# Altium PCB IMU_Board_CG_Rev1b.PcbDoc
Units mil, origin at the board's own origin, x right, y up, seen from the top; angles counter-clockwise.
Board outline 3000 x 2000 mil, 2 copper layers (Top Layer, Bottom Layer); 60 components, 36 nets, 212 pads, 67 vias.
Unrouted connection lines stored in the file: 11.
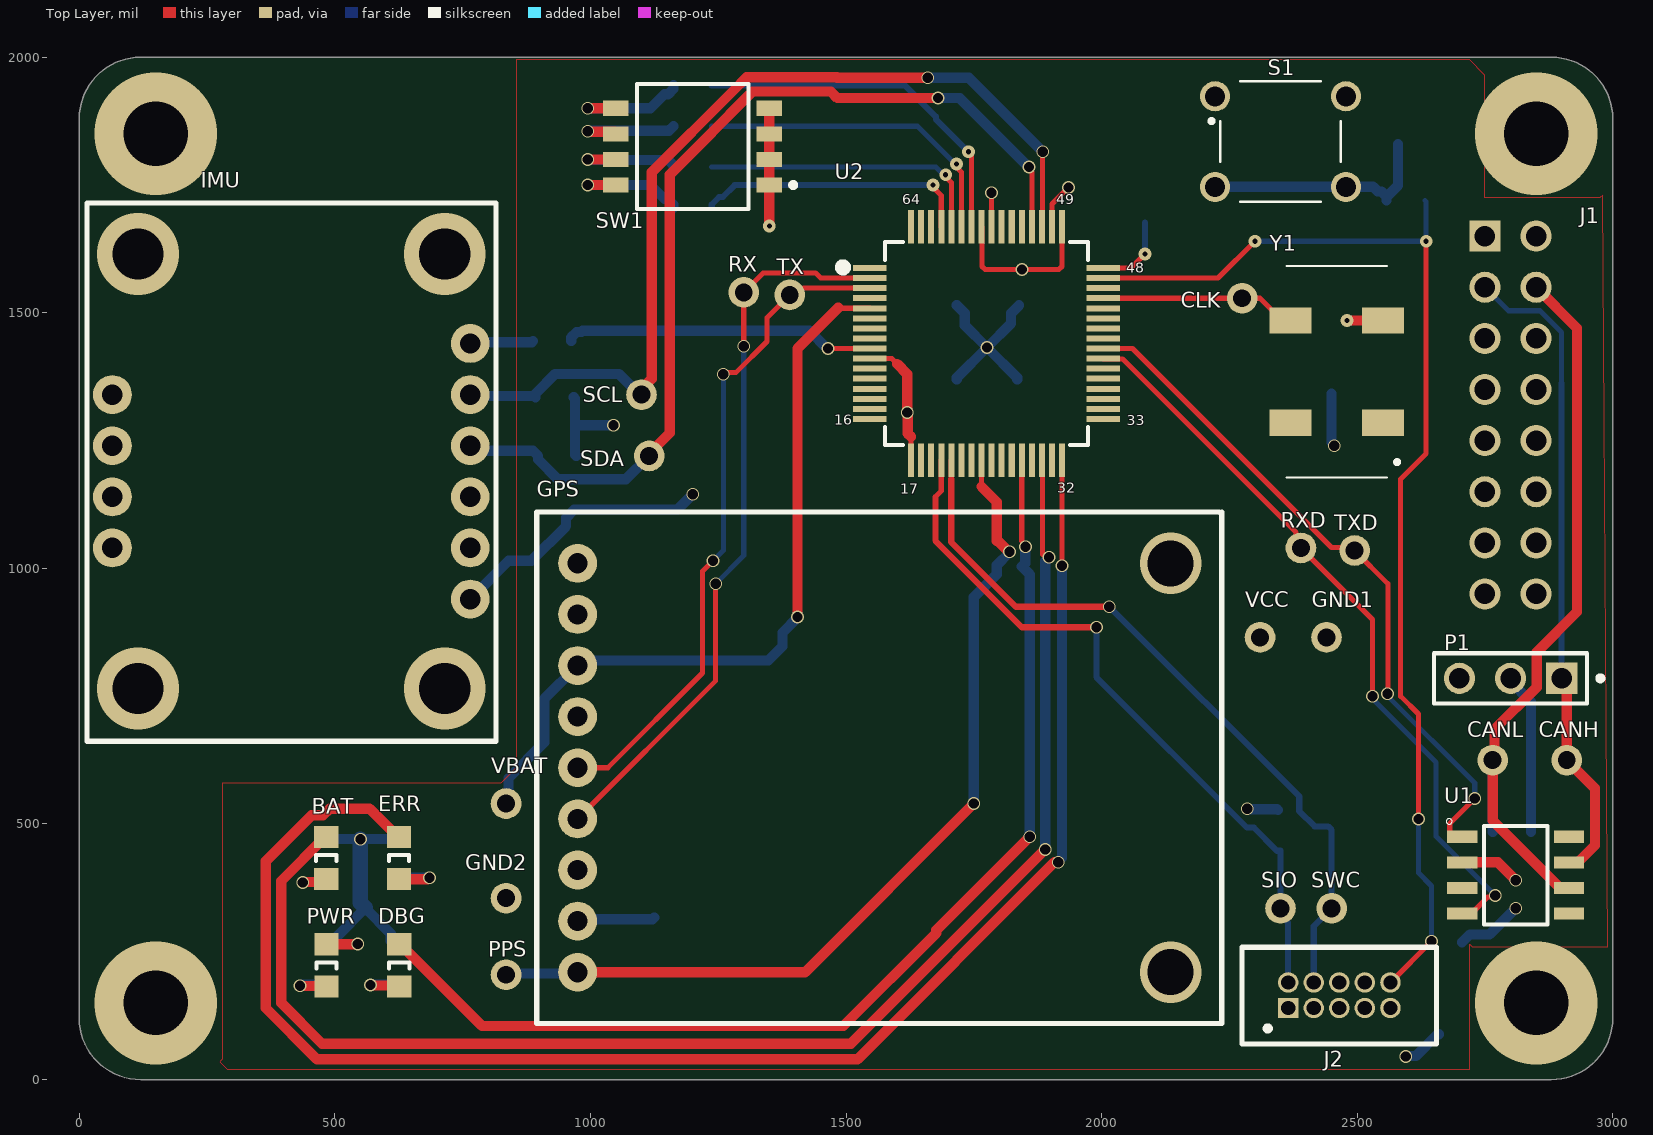
[diagram p0: Top Layer view]
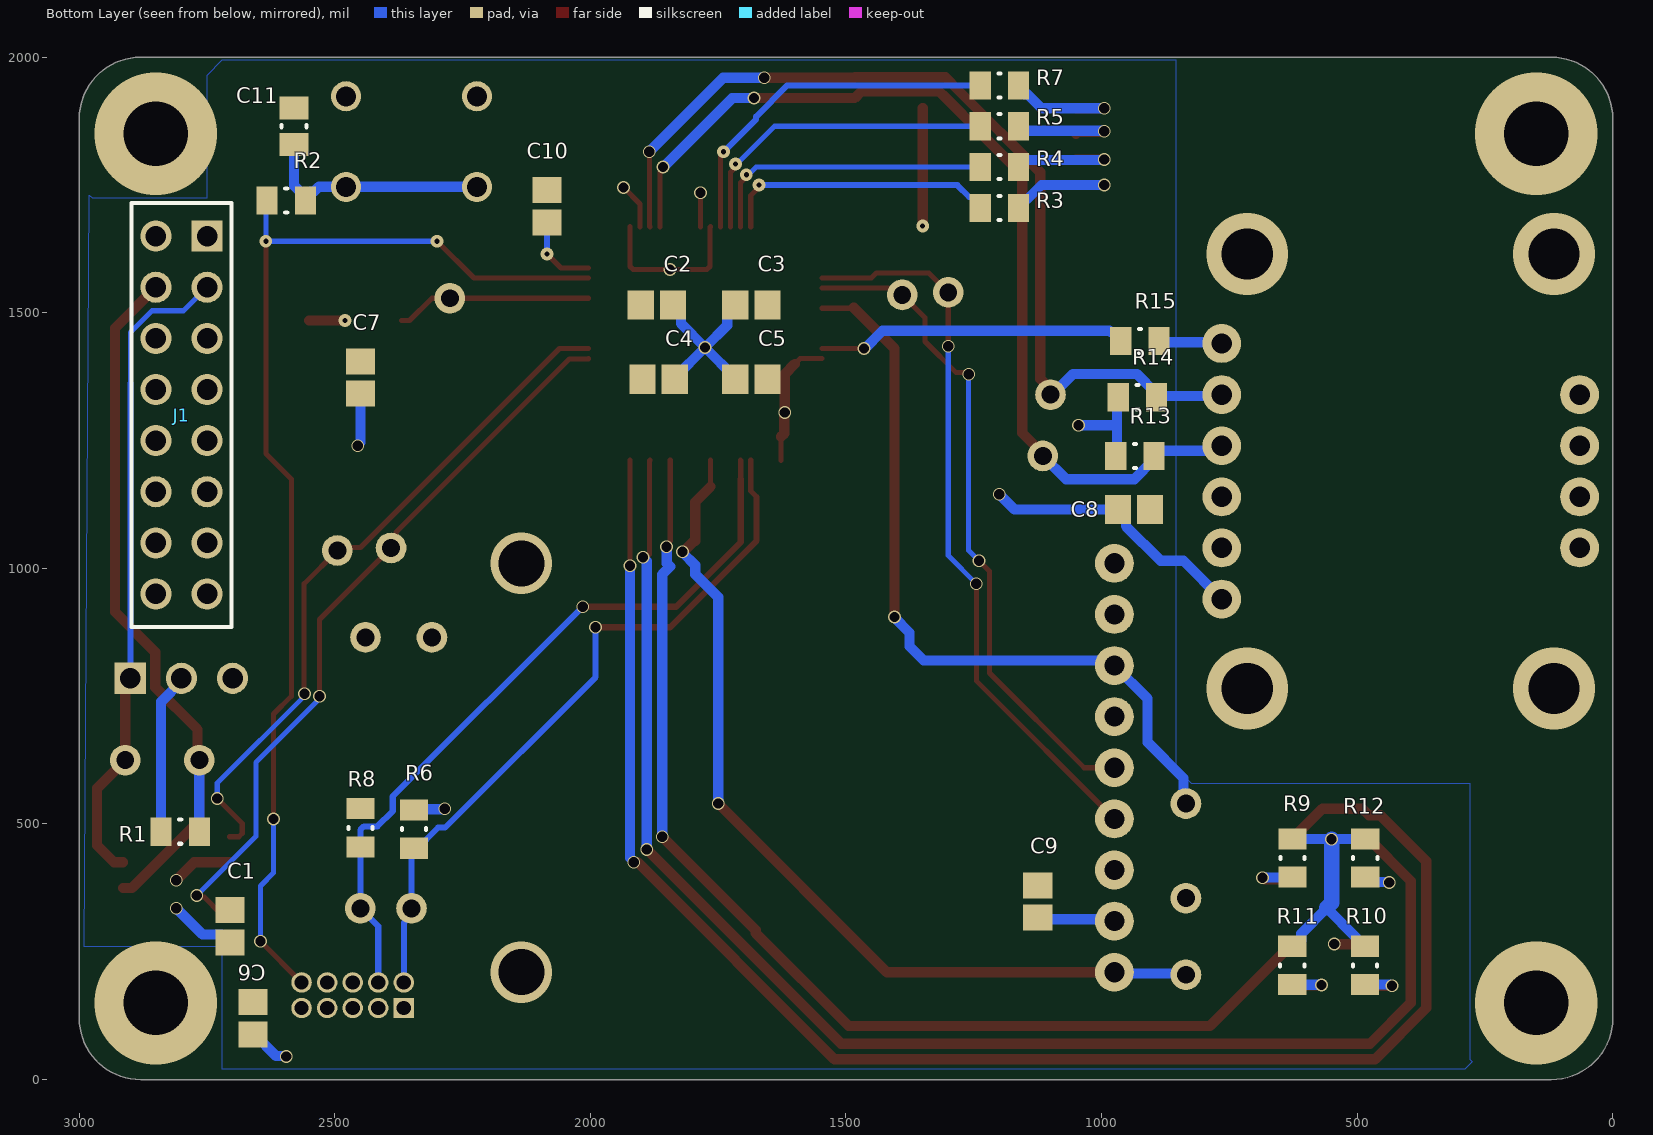
[diagram p1: Bottom Layer view, seen from below]
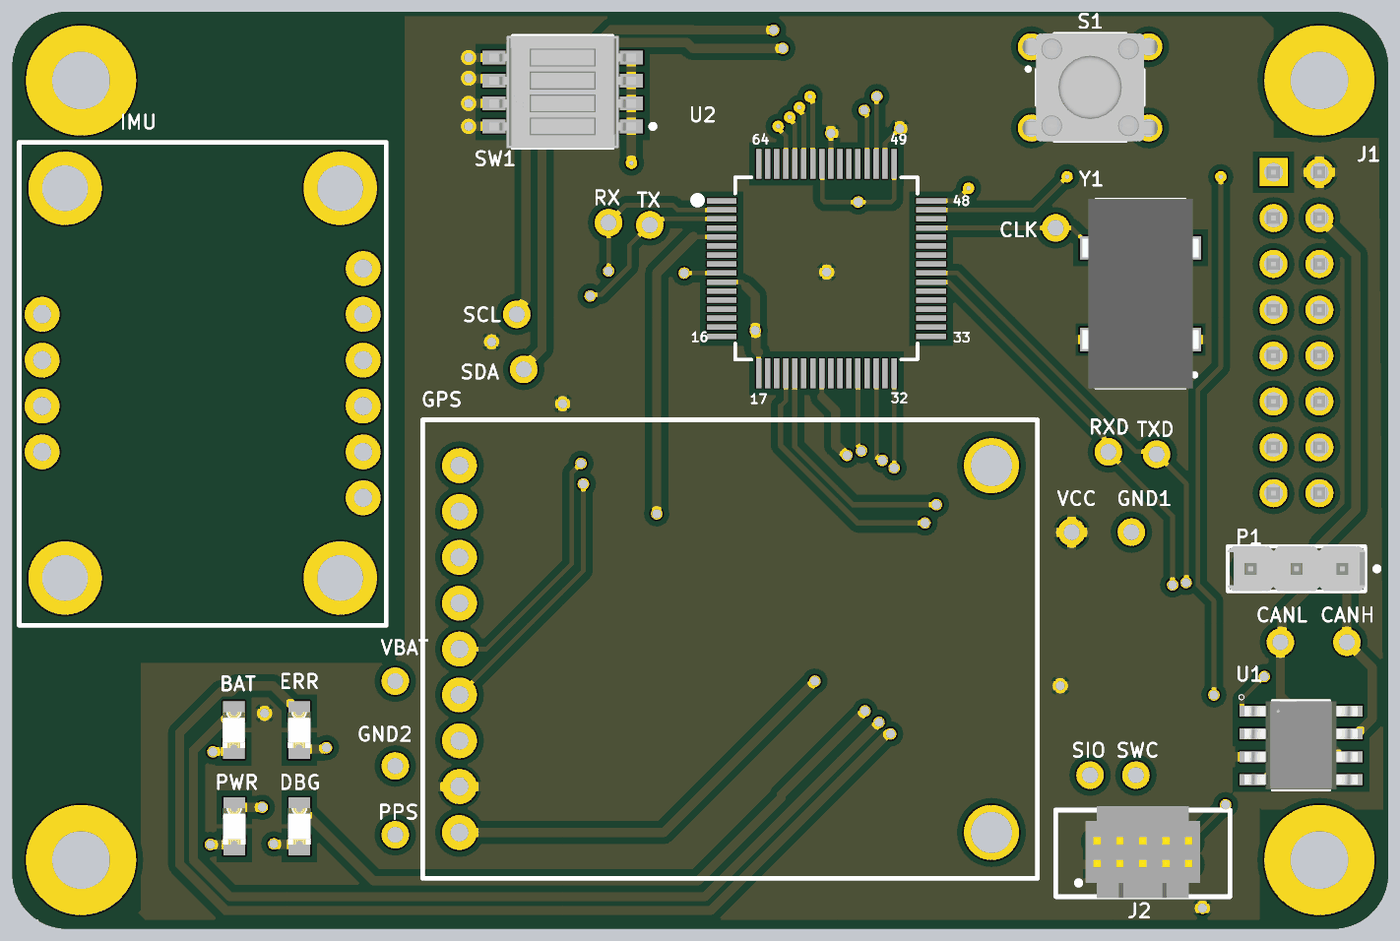
[diagram p2: 3D render of the assembled board from above, using the file's embedded part models]

## Layer stack, top to bottom
Top Solder: solder mask 0.4, Solder Resist, Dk 3.5
Top Layer: signal copper 1.4
Dielectric 1: dielectric 12.6, FR-4, Dk 4.8
Bottom Layer: signal copper 1.4
Bottom Solder: solder mask 0.4, Solder Resist, Dk 3.5

## Board outline
120,0 2880,0 ccw(c2880,120) 3000,120 3000,1880 ccw(c2880,1880) 2880,2000 120,2000 ccw(c120,1880) 0,1880 0,120 ccw(c120,120)

## Design rules (kind name [scope] priority, off if disabled: settings)
BoardOutlineClearance [All] p1: gap=10 ignorepadtopadclearanceinfootprint=FALSE
Clearance [All] p1: gap=5 ignorepadtopadclearanceinfootprint=TRUE except(0: Arc-Hole Track-Hole SMDPad-Hole THPad-Hole Via-Hole Fill-Hole Poly-Hole Region-Hole Text-Hole; 8: Track-Track Track-SMDPad Track-THPad Track-Via; 10: Poly-Poly; 15: Arc-Poly Track-Poly SMDPad-Poly THPad-Poly Via-Poly Fill-Poly)
ComponentClearance [All] p1: gap=0 collisioncheckmode=3 verticalgap=100000 showdistances=FALSE
Height [All] p1: minheight=0 maxheight=2000 prefheight=500
HoleSize [All] p1: absolutevalues=TRUE maxlimit=200 minlimit=10 maxpercent=80.000 minpercent=20.000
MinimumAnnularRing [All] p1: minimumring=6
MinimumSolderMaskSliver [All] p1: minsoldermaskwidth=5
PlaneConnect [All] p1: planeconnectstyle=Relief reliefexpansion=20 reliefentries=4 reliefconductorwidth=20 reliefairgap=10
PolygonConnect [All] p1: connectstyle=Relief reliefconductorwidth=20 reliefentries=4 polygonreliefangle="90 Angle" airgapwidth=10
RoutingVias [All] p1: holewidth=10 width=25 viastyle="Through Hole" minholewidth=10 minwidth=25 maxholewidth=28 maxwidth=50
SilkToSolderMaskClearance [IsPad] p1: minsilkscreentomaskgap=5 clearancetoexposedcopper=TRUE
SolderMaskExpansion [All] p1: expansion=4 istentingtop=FALSE
Width [All] p1: maxlimit=200 minlimit=5 preferedwidth=20 minimp=50.000000 maximp=50.000000 favimp=50.000000
24 further rules are at their usual default settings.

## Classes and differential pairs
component class IMU_Board_MC_CG: BAT C1 C2 C3 C4 C5 C6 C7 C10 C11 CANH CANL CLK DBG ERR GND1 GND2 J1 J2 P1 PWR R1 R2 R3 R4 R5 R6 R7 R8 R9 R10 R11 R12 RXD S1 SIO SW1 SWC TXD U1 U2 VCC Y1
component class IMU_Board_IMU_CG: C8 C9 GPS IMU PPS R13 R14 R15 RX SCL SDA TX VBAT

## Components (designator, comment, footprint, x,y, rotation, side; value= is the part's Value field where it differs from the comment)
1 "Screw Hole" "Screw Hole" 150,150 r90 top
2 "Screw Hole" "Screw Hole" 150,1850 r90 top
3 "Screw Hole" "Screw Hole" 2850,1850 r90 top
4 "Screw Hole" "Screw Hole" 2850,150 r90 top
BAT "LED" 0805_A 483.19,433.43 r270 top
C1 "Capacitor 0805" "Cap 0805" 2705,300 r270 bottom
C2 "Capacitor 0805" "Cap 0805" 1870.12,1515 r0 bottom
C3 "Capacitor 0805" "Cap 0805" 1685.12,1515 r180 bottom
C4 "Capacitor 0805" "Cap 0805" 1866.5,1370 r0 bottom
C5 "Capacitor 0805" "Cap 0805" 1685,1370 r180 bottom
C6 "Capacitor 0805" "Cap 0805" 2660,120 r270 bottom
C7 "Capacitor 0805" "Cap 0805" 2450,1373.5 r270 bottom
C8 "Capacitor 0805" "Cap 0805" 936.5,1115 r0 bottom
C9 "Capacitor 0805" "Cap 0805" 1125,348.5 r270 bottom
C10 "Capacitor 0805" "Cap 0805" 2085,1708.5 r90 bottom
C11 ".1uF" CAPC0805(2012)130_N 2580,1865 r90 bottom value=390pF
CANH "Test Point" "Test Point Through-hole" 2935,605 r90 top
CANL "Test Point" "Test Point Through-hole" 2790,605 r90 top
CLK "Test Point" "Test Point Through-hole" 2300,1508.58 r90 top
DBG "LED" 0805_A 626.06,223.43 r270 top
ERR "LED" 0805_A 625.32,433.43 r270 top
GND1 "Test Point" "Test Point Through-hole" 2465,845 r90 top
GND2 "Test Point" "Test Point Through-hole" 860,335 r90 top
GPS "MTK3339 Breakout" "MTK3339 Breakout" 895,1110 r270 top
IMU "BNO055 Breakout" "BNO055 Breakout" 815,660 r90 top
J1 "Stacking Header" SMTC-SSQ-108-02-X-D 2750,1650 r270 bottom
J2 "Programming Header" programming3D 2269.72,48.23 r0 top
P1 "Jumper" MOLX-22-28-4033_V 2800,785 r180 top
PPS "Test Point" "Test Point Through-hole" 860,185 r90 top
PWR "LED" 0805_A 483.94,223.43 r270 top
R1 "120R" RESC0805(2012)_N 2802.4,485 r0 bottom value="120.00 Ohm"
R2 "120R" RESC0805(2012)_N 2595,1720 r180 bottom value=100
R3 "120R" RESC0805(2012)_N 1200,1705 r180 bottom value="120.00 Ohm"
R4 "120R" RESC0805(2012)_N 1200,1785 r180 bottom value="120.00 Ohm"
R5 "120R" RESC0805(2012)_N 1200,1865 r180 bottom value="120.00 Ohm"
R6 "120R" RESC0805(2012)_N 2345,490 r90 bottom value=47k
R7 "120R" RESC0805(2012)_N 1200,1945 r180 bottom value="120.00 Ohm"
R8 "120R" RESC0805(2012)_N 2450,492.6 r270 bottom value=47k
R9 "120R" RESC0805(2012)_N 626.38,433.5 r90 bottom value="120.00 Ohm"
R10 "120R" RESC0805(2012)_N 485,223.5 r90 bottom value="120.00 Ohm"
R11 "120R" RESC0805(2012)_N 627.13,223.5 r90 bottom value="120.00 Ohm"
R12 "120R" RESC0805(2012)_N 484.25,433.5 r90 bottom value="120.00 Ohm"
R13 "120R" RESC0805(2012)_N 935,1220 r0 bottom value=4.7k
R14 "120R" RESC0805(2012)_N 930,1335 r0 bottom value=4.7k
R15 "120R" RESC0805(2012)_N 925,1445 r180 bottom value="120.00 Ohm"
RX "Test Point" "Test Point Through-hole" 1280,1515 r0 top
RXD "Test Point" "Test Point Through-hole" 2415,1020 r90 top
S1 "1825910-7" "Switch 6mm 24V (NO)" 2350,1835 r0 top
SCL "Test Point" "Test Point Through-hole" 1125,1320 r90 top
SDA "Test Point" "Test Point Through-hole" 1140,1200 r90 top
SIO "Test Point" "Test Point Through-hole" 2375,315 r90 top
SW1 "TDA04H0SB1" CKCP-TDA04H0SB1R_V 1200,1825 r180 top
SWC "Test Point" "Test Point Through-hole" 2475,315 r90 top
TX "Test Point" "Test Point Through-hole" 1370,1510 r0 top
TXD "Test Point" "Test Point Through-hole" 2520,1015 r90 top
U1 "MCP2562-E/SN" SOIC127P600X175-8N 2810,400 r0 top
U2 "CY8C4248AZI-L485" TQFP50P1200X1200X160-64N 1775,1440 r0 top
VBAT "Test Point" "Test Point Through-hole" 860,520 r90 top
VCC "Test Point" "Test Point Through-hole" 2335,845 r90 top
Y1 "SG-636PCW_50.0000MC3__ROHS" SG-636_3D 2460,1385 r90 top

## Footprints (in the part's own frame and the unit in brackets; to place one, negate y for a bottom-side part, rotate by r counter-clockwise, add the part's x,y. Pads: shape width x height; smd on the part's side, far side on the other; paste and mask are expansions set on the pad)
0805_A [mm] "Chip LED, 2-Leads, Body 2.0x1.3mm, IPC Medium Density"
  rect 1.1x1.2 smd: 1(-1.05,0) 2(1.05,0)
  silkscreen extent -0.15,-0.5 0.15,0.5, body extent -1,-0.62 1,0.63, height 0.68
"BNO055 Breakout" [mil]
  round 76 hole 40: 1(280,50) 2(380,50) 3(480,50) 4(580,50) 5(680,50) 6(780,50) 7(680,750) 8(580,750) 9(480,750) 10(380,750)
  silkscreen extent 2,0 1055,800
"Cap 0805" [mm]
  rect 1.3x1.45 smd: 1(-0.8,0) 2(0.8,0)
  body extent -1.1,-0.72 1.1,0.72, height 1.4
CAPC0805(2012)130_N [mm] "Chip Capacitor, Body 2.0x1.2mm, Height 1.3mm, IPC Medium Density"
  rect 1.15x1.45 smd: 1(-0.9,0) 2(0.9,0)
  silkscreen extent -0.05,-0.62 0.05,0.63, body extent -1.1,-0.72 1.1,0.73, height 1.3
CKCP-TDA04H0SB1R_V [mm] "SMD, 8-Leads, Body 6.21x6.2mm, Pitch 1.27mm"
  rect 1.27x0.76 smd: 1(-3.81,1.905) 2(-3.81,0.635) 3(-3.81,-0.635) 4(-3.81,-1.905) 5(3.81,-1.905) 6(3.81,-0.635) 7(3.81,0.635) 8(3.81,1.905)
  silkscreen extent -5.12,-3.11 2.78,3.11, body extent -4.06,-3.1 4.06,3.11, height 2.3
MOLX-22-28-4033_V [mm] "THD, 3-Leads, Body 7.62x2.49mm, Pitch 2.54mm"
  rect 1.55x1.55 hole 1.02: 1(-2.54,0)
  round 1.55 hole 1.02: 2(0,0) 3(2.54,0)
  silkscreen extent -4.59,-1.24 3.81,1.24, body extent -3.81,-1.24 3.81,1.24, height 8.38
"MTK3339 Breakout" [mil]
  round 76 hole 39.37: 1(100,80) 2(200,80) 3(300,80) 4(400,80) 5(500,80) 6(600,80) 7(700,80) 8(800,80) 9(900,80)
  silkscreen extent 0,0 1000,1340
programming3D [mil]
  rect 40x40 hole 28 mask+3: 1(95.28,91.77)
  round 40 hole 28 mask+3: 2(95.28,141.77) 3(145.28,91.77) 4(145.28,141.77) 5(195.28,91.77) 6(195.28,141.77) 7(245.28,91.77) 8(245.28,141.77) 9(295.28,91.77) 10(295.28,141.77)
  silkscreen extent 5,22 385,211, body extent 70,19 320,219, height 226
RESC0805(2012)_N [mm] "Chip Resistor, Body 2.0x1.3mm, IPC Medium Density"
  rect 1.05x1.4 smd: 1(-0.95,0) 2(0.95,0)
  silkscreen extent -0.05,-0.6 0.05,0.6, body extent -1.1,-0.67 1.1,0.68, height 0.7
"Screw Hole" [mil]
SG-636_3D [mm]
  rect 1.3x2.1 smd: 1(-2.54,-2.3) 2(2.54,-2.3) 3(2.54,2.3) 4(-2.54,2.3)
  silkscreen extent -5.25,-3.1 5.25,2.5, body extent -5.25,-3.22 5.25,3.22, height 2.8
SMTC-SSQ-108-02-X-D [mm] "SQ Post Socket, 2x8 Pins, Vertical, 2.54mm Pitch, Female"
  rect 1.55x1.55 hole 1.02: 1(0,0)
  round 1.55 hole 1.02: 2(0,-2.54) 3(2.54,0) 4(2.54,-2.54) 5(5.08,0) 6(5.08,-2.54) 7(7.62,0) 8(7.62,-2.54) 9(10.16,0) 10(10.16,-2.54) 11(12.7,0) 12(12.7,-2.54) 13(15.24,0) 14(15.24,-2.54) 15(17.78,0) 16(17.78,-2.54)
  silkscreen extent -1.65,-3.74 19.43,1.2, body extent -1.52,-3.75 19.3,1.21, height 8.51
SOIC127P600X175-8N [mm]
  rect 1.5x0.6 smd: 1(-2.65,1.905) 2(-2.65,0.635) 3(-2.65,-0.635) 4(-2.65,-1.905) 5(2.65,-1.905) 6(2.65,-0.635) 7(2.65,0.635) 8(2.65,1.905)
  silkscreen extent -3.44,-2.45 1.58,2.81, body extent -3.12,-2.45 3.13,2.45, height 1.76
"Switch 6mm 24V (NO)" [mm]
  round 1.498 hole 0.99: 1a(-3.25,2.25) 1b(3.25,2.25) 2a(-3.25,-2.25) 2b(3.25,-2.25)
  silkscreen extent -3.53,-3 3,3, body extent -3.9,-2.99 3.9,3, height 5.01
"Test Point Through-hole" [mil]
  round 60 hole 35: 1(20,25)
TQFP50P1200X1200X160-64N [mm]
  rect 1.65x0.3 smd mask+0.076: 1(-5.801,3.75) 2(-5.801,3.25) 3(-5.801,2.75) 4(-5.801,2.25) 5(-5.801,1.75) 6(-5.801,1.25) 7(-5.801,0.75) 8(-5.801,0.25) 9(-5.801,-0.25) 10(-5.801,-0.75) 11(-5.801,-1.25) 12(-5.801,-1.75) 13(-5.801,-2.25) 14(-5.801,-2.75) 15(-5.801,-3.25) 16(-5.801,-3.75) 33(5.801,-3.75) 34(5.801,-3.25) 35(5.801,-2.75) 36(5.801,-2.25) 37(5.801,-1.75) 38(5.801,-1.25) 39(5.801,-0.75) 40(5.801,-0.25) 41(5.801,0.25) 42(5.801,0.75) 43(5.801,1.25) 44(5.801,1.75) 45(5.801,2.25) 46(5.801,2.75) 48(5.801,3.75)
  rect 0.3x1.65 smd mask+0.076: 17(-3.75,-5.801) 18(-3.25,-5.801) 19(-2.75,-5.801) 20(-2.25,-5.801) 21(-1.75,-5.801) 22(-1.25,-5.801) 23(-0.75,-5.801) 24(-0.25,-5.801) 25(0.25,-5.801) 26(0.75,-5.801) 27(1.25,-5.801) 28(1.75,-5.801) 29(2.25,-5.801) 30(2.75,-5.801) 31(3.25,-5.801) 32(3.75,-5.801) 49(3.75,5.801) 50(3.25,5.801) 51(2.75,5.801) 52(2.25,5.801) 53(1.75,5.801) 54(1.25,5.801) 55(0.75,5.801) 56(0.25,5.801) 57(-0.25,5.801) 58(-0.75,5.801) 59(-1.25,5.801) 60(-1.75,5.801) 61(-2.25,5.801) 62(-2.75,5.801) 63(-3.25,5.801) 64(-3.75,5.801)
  rect 1.65x0.3 smd paste+0 mask+0.076: 47(5.801,3.25)
  silkscreen extent -7.33,-5.05 5.05,5.05, body extent -5.12,-5.12 5.12,5.12, height 1.6

## Part data
1 2 3 4: "Add 4 of these to your design for screw hole mounting"
BAT DBG ERR PWR: "Standard 0805 LED", Color="Super Red", Manufacturer="Wuerth Elektronik", PartNumber=150080SS75000, ComponentLink1Description="Manufacturer URL", ComponentLink1URL=http://www.we-online.com, ComponentLink2Description=Datasheet, ComponentLink2URL=http://katalog.we-online.com/led/datasheet/150080SS75000.pdf, PackageReference=0805_A
C1 C4 C5 C6 C7 C8 C9: "Standard Capacitor", Capacitance=.1µF, Case Size/Dimension=0805, Dielectric=X5R, Manufacturer=AVX, Package Description="2-Pin Surface Mount Device, Body 2.01 x 1.25 mm", Rated Voltage=10V, Tolerance (%)=±10%, Datasheet URL=http://datasheets.avx.com/cx5r.pdf, Datasheet Version=05/2016, Manufacturer URL=http://www.avx.com/, Mounting Technology=SurfaceMount, Package Reference=0805
C2 C3: "Standard Capacitor", Capacitance=10µF, Case Size/Dimension=0805, Dielectric=X5R, Manufacturer=AVX, Package Description="2-Pin Surface Mount Device, Body 2.01 x 1.25 mm", Rated Voltage=10V, Tolerance (%)=±10%, Datasheet URL=http://datasheets.avx.com/cx5r.pdf, Datasheet Version=05/2016, Manufacturer URL=http://www.avx.com/, Mounting Technology=SurfaceMount, Package Reference=0805
C10: "Standard Capacitor", Capacitance=1µF, Case Size/Dimension=0805, Dielectric=X5R, Manufacturer=AVX, Package Description="2-Pin Surface Mount Device, Body 2.01 x 1.25 mm", Rated Voltage=10V, Tolerance (%)=±10%, Datasheet URL=http://datasheets.avx.com/cx5r.pdf, Datasheet Version=05/2016, Manufacturer URL=http://www.avx.com/, Mounting Technology=SurfaceMount, Package Reference=0805
C11: library part CMP-1036-02603-1, "CAP 390pF 200V ±5% 0805 (2012 Metric) Thickness 1.3mm SMD", Case-EIA=0805, Case-Metric=2012, Rated Voltage="200 V", Tolerance=Â±5%, Max Thickness="1.3 mm", Technology=SMT
J1: "SQ Post Socket, Through-hole, Vertical, -55 to 125 degC, 2.54 mm Pitch, 16-Pin, Female, RoHS", Manufacturer=Samtec, PartNumber=SSQ-108-02-G-D, Temperature Range="-55 to 125 degC", ComponentLink1Description="Manufacturer URL", ComponentLink1URL=http://www.samtec.com, ComponentLink2Description=Datasheet, ComponentLink2URL=http://www.samtec.com/documents/webfiles/pdf/SSQ_TH.PDF, ComponentLink3Description="Package Specification", ComponentLink3URL=http://www.samtec.com/documents/webfiles/cpdf/SSQ-1XX-XX-XXX-X-XX-XXX-XX-X-MKT.pdf, DatasheetVersion=F-214, Mounting Technology=Through-hole, Orientation=Vertical, PackageDescription="Assembly, Socket Strip .025[0.64] SQ Tail", PackageReference=SSQ-108-02-X-D, PackageVersion="BD, 6/1987", Pitch="2.54 mm", RoHS=True
P1: library part CMP-1676-00001-5, "Male Header, Pitch 2.54 mm, 1 x 3 Position, Height 8.38 mm, Tail Length 3.18 mm, RoHS, Bulk", Colour=Black, Current Rating="4 A", Manufacturer=Molex, Max Operating Temperature="75 degC", Min Operating Temperature="0 degC", Package Quantity=1, Voltage Rating="250 V", ComponentLink1Description="Manufacturer URL", ComponentLink1URL=http://www.molex.com/, ComponentLink2Description=Datasheet, ComponentLink2URL=http://www.molex.com/pdm_docs/sd/022284033_sd.pdf, Contact Finish=Gold, Contact Material=Brass, Contact Plating=Gold, DatasheetVersion="Rev. G, 01/2012", Height="8.38 mm", Lead Pitch="0.1 inch", Length="7.62 mm", Mount="Through Hole", Mounting Technology="Through Hole", PackageDescription="Male Header, Pitch 2.54 mm, 1 x 3 Position, Height 8.38 mm, Tail Length 3.18 mm", PackageReference=22-28-4033, Packaging=Bulk, Pins=3, REACH SVHC=Unknown, RoHSCompliant=true, Rows=1
R1 R2 R3 R4 R5 R6 R7 R8 R9 R10 R11 R12 R13 R14 R15: library part "Resistor 0805", "Generic 0805 Resistor", Case-EIA=0805, Case-Metric=2012, Power="0.125 W", Tolerance="5 %", Technology=SMT
S1: library part "Switch 6mm 24V (NO)", "FSM4JAH=6MM TACT SWITCH, HIGH TEMP", Contact_Current_Rating="50 mA", Package=None, Configuration_Pole-Throw="Single Pole - Single Throw", Digi-Key_Part_Number=450-1804-ND, Digi-Key_Purchase_URL=https://www.digikey.com/product-detail/en/te-connectivity-alcoswitch-switches/1825910-7/450-1804-ND/1731414?utm_source=snapeda&utm_medium=aggregator&utm_campaign=symbol, EU_RoHS_Compliance=Compliant, MF="TE Connectivity", MP=1825910-7, SnapEDA_Link=https://www.snapeda.com/parts/1825910-7/TE%20Connectivity%20ALCOSWITCH%20Switches/view-part/?ref=snap, TE_purchase_URL=https://www.te.com/usa-en/product-1825910-7.html?te_bu=Cor&te_type=disp&te_campaign=seda_glo_cor-seda-global-disp-prtnr-fy19-seda-model-bom-cta_sma-317_1&elqCampaignId=32493
SW1: library part "Dip Switch Array SMD Half-Pitch", "Ultra-Miniature Surface Mount Half-Pitch DIP Switch, 25 mA, 24 V, -40 to 85 degC, 8-Pin SMD, RoHS, Tube", Case\Package=DIP, Contact Current Rating="100 mA", Max Contact Resistance="100 mohm", Max Current Rating="25 mA", Max Operating Temperature="85 degC", Max Voltage Rating (DC)="24 V", Min Operating Temperature="-40 degC", Package Quantity=70, ComponentLink1Description=Datasheet, ComponentLink1URL=http://www.ck-components.com/media/1328/tda.pdf, Contact Finish=Gold, Contact Material=Copper, Contact Plating=Gold, Current Rating="100 mA", DatasheetVersion=02/2016, Height="2.3 mm", Lead Pitch="1.27 mm", Length="6.21 mm", Mount="Surface Mount", Mounting Technology="Surface Mount", PackageDescription="8-Pin Surface Mount Device, Body 6.21 x 6.2 mm, Pitch 1.27 mm", PackageReference=TDA04H0SB1R, Packaging=Rail/Tube, Pins=4, Radiation Hardening=No, REACH SVHC="No SVHC", RoHSCompliant=true, Throw Configuration=SPST, Voltage Rating (DC)="24 V"
U1: library part "CAN Tranceiver", "Microchip MCP2562-E/SN, CAN Transceiver 1MBps 1-channel IEC 61000-4-2, 8-Pin SOIC", Package="SO-8 Microchip", Availability=Unavailable, MF=Microchip, MP=MCP2562-E/SN, Price=None, SnapEDA_Link=https://www.snapeda.com/parts/MCP2562-E/SN/Microchip/view-part/?ref=snap
U2: library part "PSOC MC", "64 pin psoc", Part_Number=CY8C4248AZI-L485
Y1: library part Oscilator, "Standard Clock Oscillators", Arrow Part Number="SG-636PCW 50.0000MC3: ROHS", Manufacturer_Name="Epson Timing", Datasheet Link=http://www.mouser.com/ds/2/137/G-636PCE_en-1003252.pdf, Manufacturer_Part_Number="SG-636PCW 50.0000MC3: ROHS"

## Via types
v1: diameter 25, hole 20, Top Layer to Bottom Layer, 48 vias
v2: diameter 25, hole 10, Top Layer to Bottom Layer, 9 vias
v3: diameter 160, hole 100, Top Layer to Bottom Layer, 4 vias
v4: diameter 240, hole 126, Top Layer to Bottom Layer, 4 vias
v5: diameter 120, hole 90, Top Layer to Bottom Layer, 2 vias

## Nets (pads, with @x,y where several pads share a name; then routed paths per layer and width w, separated by ;. In a path a pad name is that pad's centre, name@x,y a point inside that pad or via, vN(x,y) a via of type N, cw(c..) or ccw(c..) an arc to the next point about the centre after c; other vN are vias at no path point)
"BAT STAT": BAT.1 U2.30 | length 2822.2
  Top Layer w10: U2.30 1884.05,1210.84 1884.05,1027.55 1887.19,1027.55 1893.05,1021.69 v1(1897.11,1021.69)
  Top Layer w20: BAT.1 481.22,474.76 395,388.54 395,150 475,70 1509.5,70 v1(1889.75,450.25)
  Bottom Layer w20: v1(1889.75,450.25) 1889.75,1014.33 v1(1897.11,1021.69)
CANH: CANH.1 J1.3 P1.1 U1.7 | length 1281.5
  Top Layer w20: P1.1 2910,775 CANH.1 2965,570 2965,457.95 2932.05,425 U1.7
  Bottom Layer w10: J1.3 2795.87,1504.13 2857.4,1504.13 2900,1461.53 2900,1362.95
  Bottom Layer w12: P1.1 2900,1362.95
CANL: CANL.1 J1.4 R1.1 U1.6 | length 1488.7
  Top Layer w20: J1.4 2930,1470 2930,915 2851.33,836.33 2851.33,767.72 2768.61,685 2768.61,628.61 CANL.1 2765,506.61 2896.61,375 U1.6
  Bottom Layer w20: R1.1 CANL.1
CANL1: P1.2 R1.2 | length 316.5
  Bottom Layer w20: P1.2 2800,779.03 2839.8,739.23 R1.2
CLK: CLK.1 U2.45 Y1.3 | length 384.1
  Top Layer w10: U2.45 CLK.1 2310.12,1528.58 2353.7,1485 Y1.3
DBG: DBG.1 U2.28 | length 2205.2
  Top Layer w10: U2.28 1843.9,1053.86 1851.4,1046.36 v1(1851.4,1042.3)
  Top Layer w20: DBG.1 628.03,264.76 787.8,105 1495,105 1676.65,286.65 1676.65,292.4 v1(1859.25,475)
  Bottom Layer w20: v1(1851.4,1042.3) 1850.44,1041.34 1850.44,1010.19 1843.9,1003.65 1859.25,988.3 v1(1859.25,475)
DIP1: R7.1 U2.58 | length 708.3
  Top Layer w10: v2(1739.5,1815) 1745.24,1809.26 1745.24,1668.61 U2.58
  Bottom Layer w12: R7.1 1615,1945 1676.01,1883.99 1676.01,1878.49 v2(1739.5,1815)
DIP2: R5.1 U2.59 | length 636.2
  Top Layer w10: v2(1716.21,1791.21) 1716.21,1784.73 1725.79,1775.15 U2.59
  Bottom Layer w10: R5.1 1640,1865 1713.79,1791.21 v2(1716.21,1791.21)
DIP3: R4.1 U2.60 | length 570
  Top Layer w10: v2(1695,1770) 1695,1765.94 1706.1,1754.84 U2.60
  Bottom Layer w10: R4.1 1675.94,1785 1690.94,1770 v2(1695,1770)
DIP4: R3.1 U2.61 | length 543.7
  Top Layer w10: v2(1670,1750) 1670,1745.94 1686.42,1729.52 U2.61
  Bottom Layer w12: R3.1 1237.4,1711.89 1252.07,1726.56 1258.96,1726.56 1282.4,1750 v2(1670,1750)
ERR: ERR.1 U2.32 | length 3153.7
  Top Layer w10: v1(1922.64,1005) U2.32
  Top Layer w20: ERR.1 623.35,474.76 568.11,530 490,530 476.94,516.94 454.63,516.94 365,427.31 365,140 465,40 1522.63,40 1907.63,425 v1(1915,425)
  Bottom Layer w20: v1(1915,425) 1915,426.35 1922.64,433.99 v1(1922.64,1005)
GND: C1.1 C2.2 C3.2 C4.2 C5.2 C6.1 C7.1 C8.1 C9.1 C10.2 C11.2 GND1.1 GND2.1 GPS.7 IMU.3 J1.6 J1.8 J1.10 J1.12 J1.14 J1.16 J2.3 J2.5 J2.9 PWR.1 R8.1 S1.1a S1.1b SW1.1 SW1.2 SW1.3 SW1.4 U1.2 U2.10 U2.17 U2.49 U2.57 Y1.2 | length 1054.9
  Top Layer w10: U2.10 1589.53,1410.47 1600,1400 ; U2.17 1627.36,1257.36 ; U2.57 1765.94,1667.6 1765.94,1590.86 1771.79,1585 v1(1844.29,1585) 1916.78,1585 1922.64,1590.86 U2.49
  Top Layer w20: PWR.1 484.06,264.88 544.88,264.88 v1(545,265) ; v2(1350,1670) SW1.1 SW1.2 SW1.3 SW1.4 ; 1600,1400 1620,1380 v1(1620,1305) 1620.96,1304.04 1620.96,1263.77 1627.36,1257.36 ; v2(2480,1485) Y1.2 ; U1.2 2775,425 v1(2810,390)
IMU_RST: R15.1 U2.9 | length 611.1
  Top Layer w10: v1(1465,1430) 1465.08,1430.08 1546.54,1430.08 U2.9
  Bottom Layer w20: R15.1 962.4,1451.89 973.07,1462.56 982.35,1462.56 984.79,1465 1428.65,1465 1463.65,1430 v1(1465,1430)
NetBAT_2: BAT.2 R12.1 | length 99.6
  Top Layer w20: v1(437.35,385.79) 438.3,386.74 477.85,386.74 BAT.2
  Bottom Layer w20: v1(437.35,385.79) 438.3,386.74 474.89,386.74 R12.1
NetC10_1: C10.1 U2.48 | length 155
  Top Layer w10: U2.48 2057.64,1587.64 v2(2085,1615)
  Bottom Layer w12: v2(2085,1615) C10.1
NetDBG_2: DBG.2 R11.1 | length 115.6
  Top Layer w20: v1(570,185) 570.96,184.04 624.11,184.04 DBG.2
  Bottom Layer w20: v1(570,185) 570.55,185.55 626.57,185.55 R11.1 R11.1@627.68,185.55
NetERR_2: ERR.2 R9.1 | length 120
  Top Layer w20: ERR.2 680.73,392.09 683.65,395 v1(685,395)
  Bottom Layer w20: R9.1 626.93,395.55 684.45,395.55 v1(685,395)
NetIMU_6: IMU.6 R15.2 | length 124.7
  Bottom Layer w20: IMU.6 767.5,1442.5 885.1,1442.5 R15.2
NetPWR_2: PWR.2 R10.1 | length 106.8
  Top Layer w20: v1(431.88,183.78) 432.73,182.93 483.09,182.93 PWR.2
  Bottom Layer w20: v1(431.88,183.78) 433.24,183.78 435.56,186.1 R10.1
NetR3_2: R3.2 SW1.8 | length 245.3
  Top Layer w20: v1(995,1750) SW1.8
  Bottom Layer w20: v1(995,1750) 1117.6,1750 1145.04,1722.56 1151.93,1722.56 1162.6,1711.89 R3.2
NetR4_2: R4.2 SW1.7 | length 230.8
  Top Layer w20: v1(995,1800) SW1.7
  Bottom Layer w20: v1(995,1800) 995.96,1799.04 1151.93,1799.04 1162.6,1788.37 R4.2
NetR5_2: R5.2 SW1.6 | length 228.8
  Top Layer w20: v1(995,1855) 995.96,1854.04 1045.96,1854.04 SW1.6
  Bottom Layer w20: v1(995,1855) 995.96,1855.96 1153.55,1855.96 R5.2
NetR7_2: R7.2 SW1.5 | length 245.3
  Top Layer w20: v1(995,1900) SW1.5
  Bottom Layer w20: v1(995,1900) 1117.6,1900 1145.04,1927.44 1151.93,1927.44 1162.6,1938.11 R7.2
PPS: GPS.9 PPS.1 U2.24 | length 1782.8
  Top Layer w10: 1765,1160 1765.16,1160.16 U2.24
  Top Layer w20: PPS.1@826,205 PPS.1@828.5,207.5 ; GPS.9 1420,210 v1(1750,540) ; 1765,1160 1795,1130 1795,1053.94 1797.18,1053.94 1818.59,1032.54 v1(1819.94,1032.54)
  Bottom Layer w20: PPS.1 837.5,207.5 972.5,207.5 GPS.9 ; v1(1750,540) 1750,943.65 1795,988.65 1795,1006.24 1819.94,1031.18 v1(1819.94,1032.54)
PWR: C1.2 C2.1 C3.1 C4.1 C5.1 C6.2 C7.2 C8.2 C9.2 GPS.8 IMU.1 J1.2 J2.1 R6.2 R9.2 R10.2 R11.2 R12.2 R13.2 R14.2 U1.3 U2.11 U2.26 U2.50 U2.56 VCC.1 Y1.1 Y1.4 | length 2299.8
  Top Layer w10: U2.56 v1(1784.84,1734.84) ; U2.50 1902.95,1712.95 v1(1935,1745)
  Bottom Layer w20: R12.2 R9.2 ; R10.2 491.89,260.91 502.56,271.57 502.56,278.46 560,335.91 560,335 609.57,285.43 609.57,271.57 620.24,260.91 R11.2 ; IMU.1 839.86,1014.86 884.45,1014.86 952.4,1082.81 952.4,1099.41 C8.2 1169.9,1115 1199.9,1145 v1(1200,1145) ; R14.2 969.9,1332.5 969.9,1277.5 ; R13.2 969.9,1222.5 969.9,1277.5 ; GPS.8 978.5,313.5 1121.5,313.5 C9.2 ; v1(1045,1280) 972.4,1280 969.9,1277.5 ; C5.1 1716.5,1372.95 v1(1775.75,1432.2) ; C3.1 1732.2,1499.41 1732.2,1475.75 v1(1775.75,1432.2) ; C4.1 1835,1372.95 v1(1775.75,1432.2) ; C2.1 1823.03,1499.41 1823.03,1479.49 v1(1775.75,1432.2) ; v1(2285,530) 2285.96,529.04 2343.36,529.04 R6.2 ; C7.2 2450,1246.35 2455,1241.35 v1(2455,1240) ; v1(2595,45) 2595.96,45.96 2614.5,45.96 2657.05,88.5 C6.2 ; C1.2 2720.59,284.09 2759.09,284.09 v1(2810,335)
  Bottom Layer w30: v1(550,470) 550,345.91 560,335.91
RX: GPS.6 RX.1 U2.2 | length 1431.1
  Top Layer w10: GPS.6 1245,780 v1(1245,970) ; v1(1300,1434.5) RX.1 1338,1578 1440.64,1578 1450.69,1567.95 U2.2
  Bottom Layer w10: v1(1245,970) 1300,1025 v1(1300,1434.5)
RXD: RXD.1 U1.4 U2.39 | length 1468.6
  Top Layer w10: U2.39 2004.16,1409.69 2041.24,1409.69 2380.43,1070.5 2380.43,1049.57 RXD.1 2530,900 2530,750.06 v1(2529.92,749.99) ; U1.4 2723.39,325 2755.52,357.13 2767.13,357.13 v1(2770,360)
  Bottom Layer w10: v1(2529.92,749.99) 2530,749.91 2530,745 2654.5,620.5 2654.5,475.5 v1(2770,360)
SCL: IMU.5 R14.1 SCL.1 U2.51 | length 1869.9
  Top Layer w10: U2.51 1884.05,1669.16 1884.05,1814.05 v1(1885,1815)
  Top Layer w20: SCL.1 1100,1350.82 1120,1370.82 1120,1775 1279,1934 1305.95,1960.96 1481.82,1960.96 1482.78,1960 v1(1660,1960)
  Bottom Layer w20: IMU.5 767.5,1337.5 890.1,1337.5 R14.1 892.6,1341.89 931.27,1380.56 1055.71,1380.56 1096.27,1340 SCL.1 ; v1(1660,1960) 1740,1960 v1(1885,1815)
SDA: IMU.4 R13.1 SDA.1 U2.52 | length 1917.5
  Top Layer w10: v1(1857.77,1785) 1857.77,1780.94 1863.58,1775.13 U2.52
  Top Layer w20: SDA.1 1115,1224.85 1155,1264.85 1155,1770 1236.27,1851.27 1236.27,1851.67 1307,1922.4 1317.54,1932.96 1470.22,1932.96 1483.18,1920 v1(1680,1920)
  Bottom Layer w20: IMU.4 775,1230 887.6,1230 R13.1 897.6,1213.11 936.27,1174.44 1069.44,1174.44 SDA.1 ; v1(1680,1920) 1722.77,1920 v1(1857.77,1785)
SWCLK: J2.4 R8.2 SWC.1 U2.21 | length 1467
  Top Layer w10: 1705.88,1175 1705.88,1211.4 U2.21
  Top Layer w12: 1705.88,1175 1705.88,1051.64 1832.52,925 v1(2015,925)
  Bottom Layer w12: v1(2015,925) 2015.43,925 2386.56,553.87 2386.56,525.41 2416.64,495.33 2442.97,495.33 2450,488.3 R8.2 SWC.1 2415,300 J2.4
SWDIO: J2.2 R6.1 SIO.1 U2.20 | length 1409.3
  Top Layer w10: 1675,1140 1686.42,1151.42 U2.20
  Top Layer w12: 1675,1140 1675,1054.24 1844.24,885 v1(1990,885)
  Bottom Layer w12: v1(1990,885) 1990,787.52 2284.38,493.15 2297.56,493.15 2343.11,447.6 2350,447.6 SIO.1 2350,322.01 2365,307.01 J2.2
TX: GPS.5 TX.1 U2.3 | length 1306.2
  Top Layer w10: GPS.5 1034,610 1219.5,795.5 1219.5,994.5 v1(1240,1015) ; v1(1260,1380) 1262.87,1382.87 1284.43,1382.87 1345.5,1443.94 1345.5,1490.5 TX.1 1403.53,1535 1416.8,1548.27 U2.3
  Bottom Layer w10: v1(1240,1015) 1260,1035 v1(1260,1380)
TXD: TXD.1 U1.1 U2.40 | length 1353.8
  Top Layer w10: U2.40 2060.65,1430.16 2450,1040.81 2489.19,1040.81 TXD.1 2560,970 2560,755.5 v1(2559.5,755) ; U1.1 2687.95,475 2681.14,481.81 2681.14,501.14 v1(2730,550)
  Bottom Layer w10: v1(2559.5,755) 2560,754.5 2560,750 2730,580 v1(2730,550)
VBAT: GPS.3 U2.5 VBAT.1 | length 1512.1
  Top Layer w10: 1485,1510 1486.1,1508.9 U2.5
  Top Layer w20: v1(1405,905) 1405,1430 1485,1510
  Bottom Layer w20: VBAT.1@840,540 840,590 910,660 910,745 GPS.3 985,820 1348.28,820 1375.76,847.47 1375.76,874.41 1405,903.65 v1(1405,905)
XRES: J2.10 R2.1 U2.47 | length 2271.7
  Top Layer w10: U2.47 2227.95,1567.95 v2(2300,1640) ; J2.10 v1(2645.5,270.5) ; v1(2620,510) 2620,715 2585,750 2585,1175 2635,1225 v2(2635,1640)
  Bottom Layer w10: v2(2300,1640) v2(2635,1640) 2635,1717.4 R2.1 ; v1(2620,510) 2620,404.44 2645.5,378.94 v1(2645.5,270.5)
XRES1: C11.1 R2.2 S1.2a S1.2b | length 462.5
  Bottom Layer w20: S1.2a S1.2b 2531.18,1746.42 2540.04,1737.56 2546.93,1737.56 R2.2@2557.6,1726.89 ; R2.2 R2.2@2557.6,1726.89 ; C11.1 2580,1749.29 R2.2@2557.6,1726.89
pads on no net: GPS.1 GPS.2 GPS.4 IMU.2 IMU.7 IMU.8 IMU.9 IMU.10 J1.1 J1.5 J1.7 J1.9 J1.11 J1.13 J1.15 J2.6 J2.7 J2.8 P1.3 U1.5 U1.8 U2.1 U2.4 U2.6 U2.7 U2.8 U2.12 U2.13 U2.14 U2.15 U2.16 U2.18 U2.19 U2.22 U2.23 U2.25 U2.27 U2.29 U2.31 U2.33 U2.34 U2.35 U2.36 U2.37 U2.38 U2.41 U2.42 U2.43 U2.44 U2.46 U2.53 U2.54 U2.55 U2.62 U2.63 U2.64
copper on no net:
  other v3: 115,765 715,765 115,1615 715,1615
  other v4: 150,150 2850,150 150,1850 2850,1850
  other v5: 2135,210 2135,1010

## Polygon pours and split planes (outlines as drawn)
PWR on Top Layer "NONET_L01_P000" (solid, remove dead copper, shelved, pour order 0): 2980,1730 2975,1725 2750,1725 2750,1965 2720,1995 855,1995 855,610 825,580 280,580 280,40 275,35 290,20 2720,20 2720,265 2725,260 2990,260
GND on Bottom Layer "NONET_L02_P001" (solid, remove dead copper, shelved, pour order 1): 2980,1730 2975,1725 2750,1725 2750,1965 2720,1995 855,1995 855,610 825,580 280,580 280,40 275,35 290,20 2720,20 2720,265 2725,260 2990,260

## Text inside footprints (layer, text, board x,y; h text height)
U2: Top Overlay "64" at 1610,1712 h19.68; Top Overlay "49" at 1911,1712 h19.68; Top Overlay "48" at 2048,1578 h19.68; Top Overlay "33" at 2049,1280 h19.68; Top Overlay "32" at 1913,1148 h19.68; Top Overlay "17" at 1606,1146 h19.68; Top Overlay "16" at 1477.35,1281.13 h19.68